# EAGLE board ProiectTSC v16 (EAGLE 9.7.0)
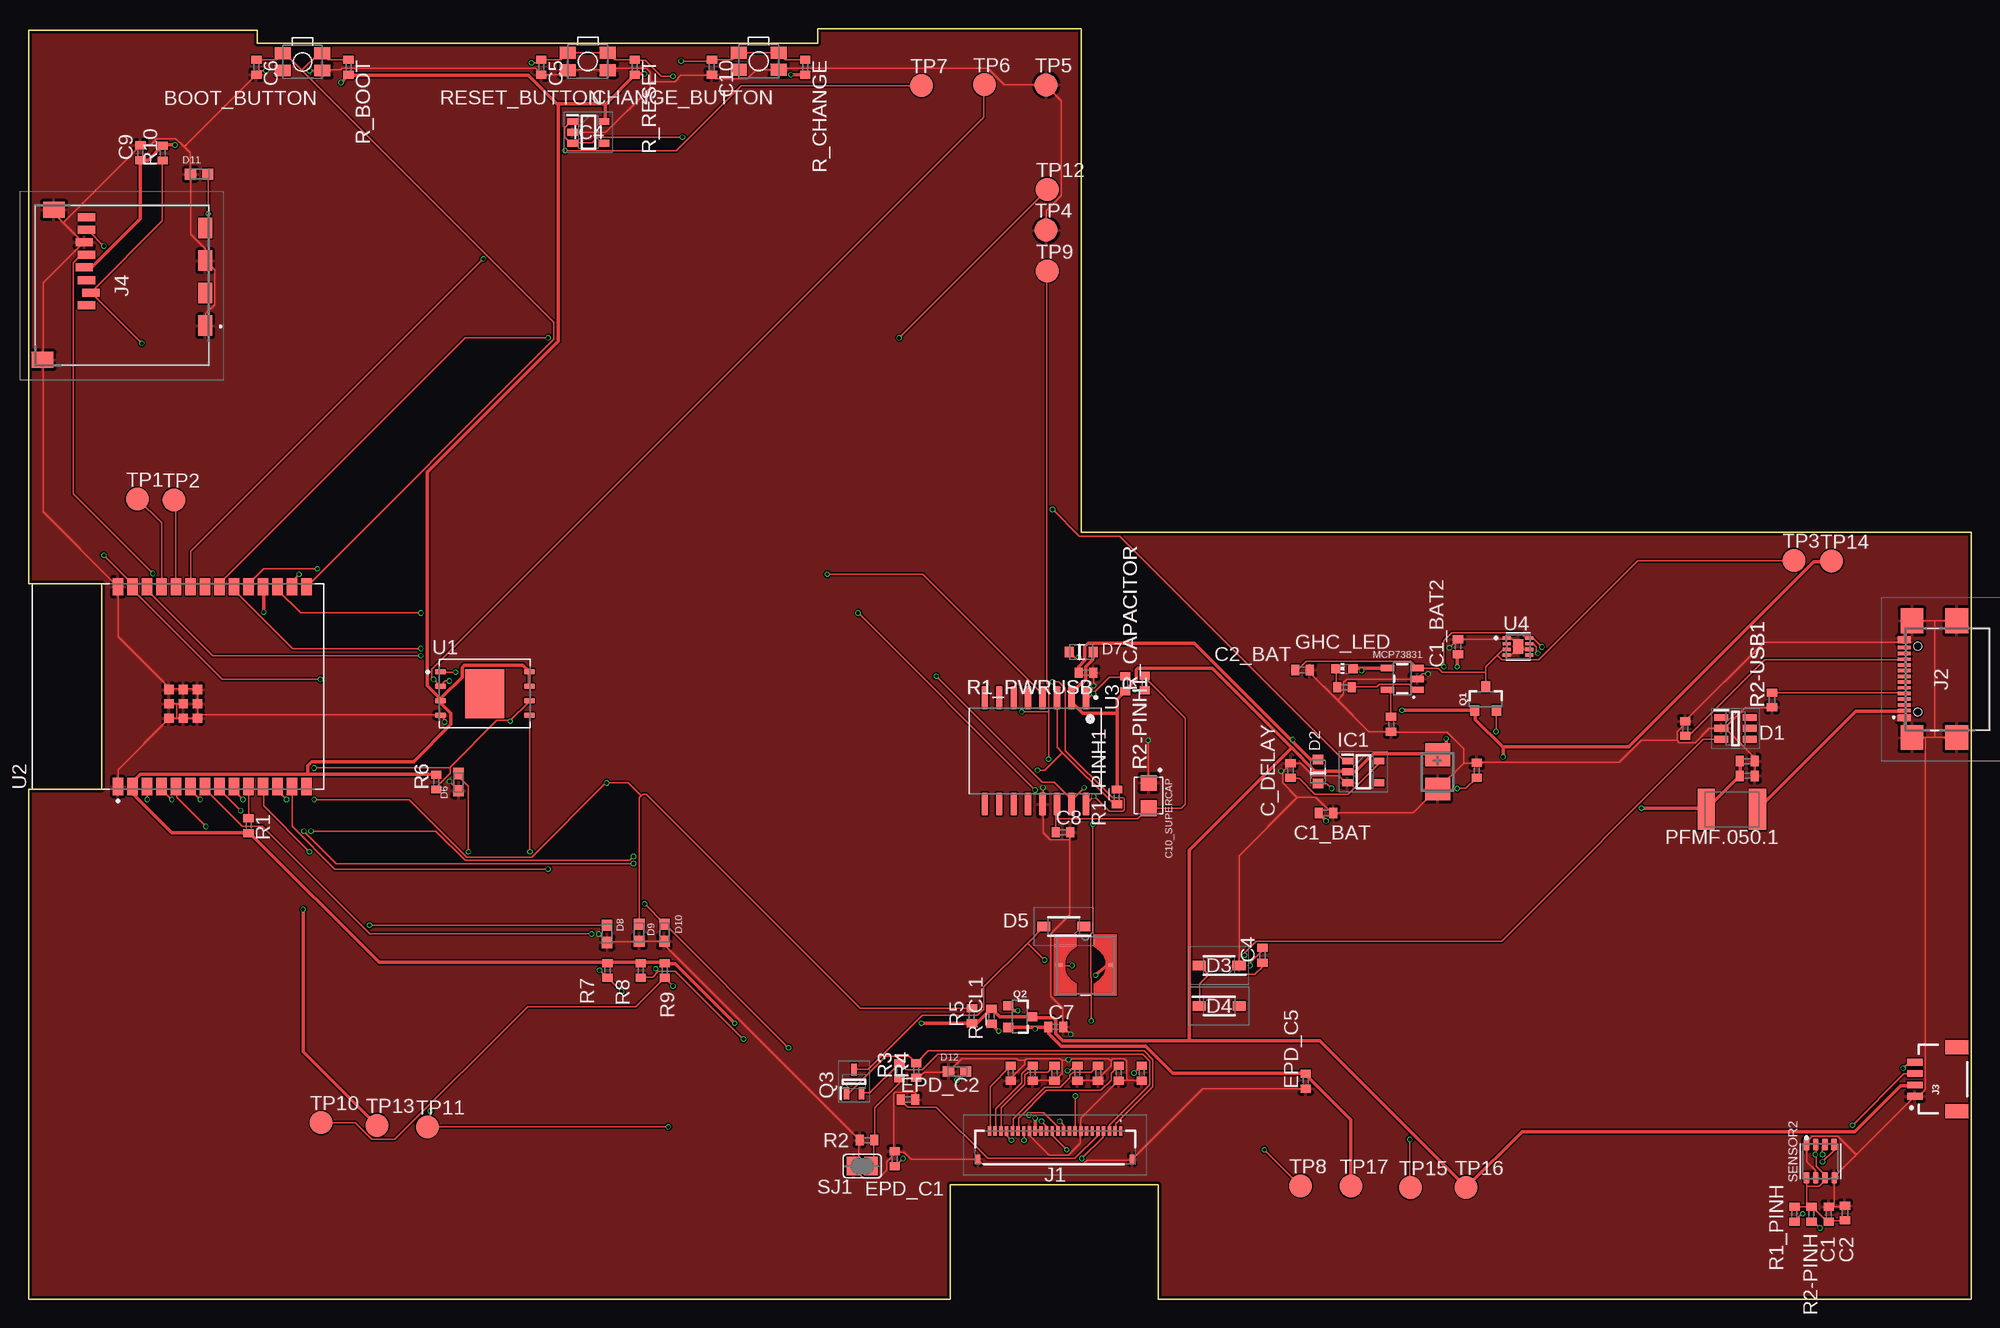
[diagram p0: board, top side]
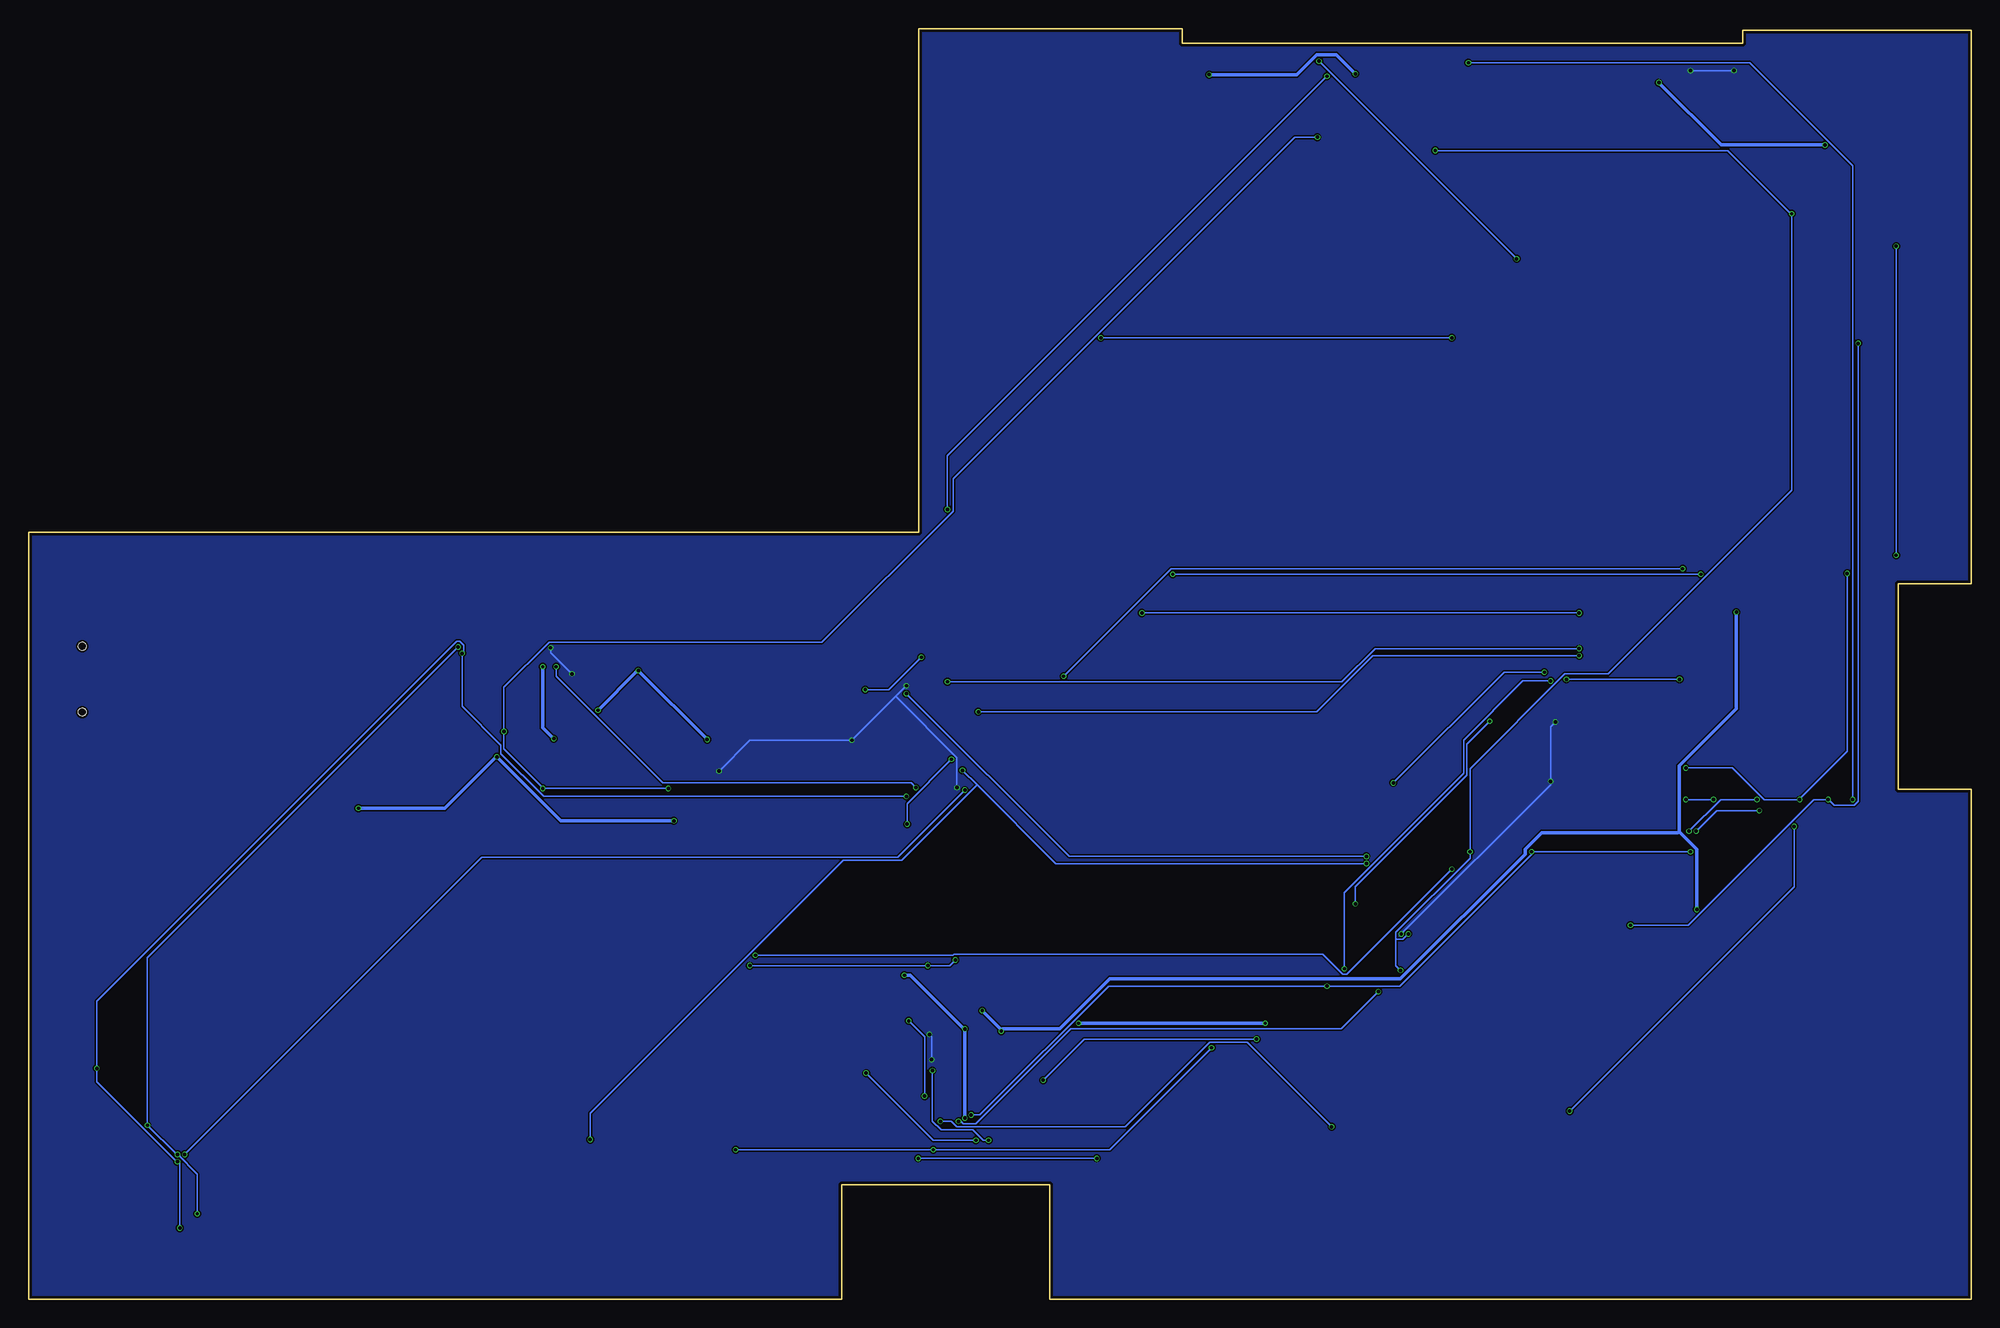
[diagram p1: board, bottom side, seen from below]

Size 170.2 x 111.3 mm. Coordinates in mm from the lower left corner, seen from the top.
Outline: 170.2,67.2 92.2,67.2 92.2,111.3 69.15,111.3 69.15,110 20.05,110 20.05,111.14 0,111.14 0,62.65 6.42,62.65 6.42,44.65 0,44.65 0,0 80.75,0 80.75,10 98.95,10 98.95,0 170.2,0 170.2,67.2
Copper layers (1*16): Top 0.035mm / dielectric 1.6mm / Bottom 0.035mm
Design rules "jlcpcb-2layers.dru": minimum track width 0.15mm, minimum drill 0.3mm, track to track 5mil, track to pad 5mil, pad to pad 5mil, via to via 5mil, smd to smd 5mil, copper to edge 0.2mm, drill to drill 6mil, minimum pad ring 10mil, minimum via ring 3mil, stop-mask expansion 4mil, vias tented up to drill 0mil, thermal gap 10mil
Net classes: 1 Vwires: width 0.3 mm

## Footprints (pad centres in the part's own frame; a part is rotated, then mirrored left to right if it is on the bottom)
MYBUTTON = smd 1.4 x 1.05: 1 1.75,0.75; 2 -1.75,0.75; 3 -1.75,-0.75; 4 1.75,-0.75
ESP32_WROVER_EAGLE-LTSPICE_C0402 = smd 0.7 x 0.9: 1 -0.65,0; 2 0.65,0
RCL_CT3528 = smd 2 x 2.2: + -1.5,0; - 1.5,0
CAPCP3225X100N = smd 1.4 x 1.4: 1 -1.1,0; 2 1.1,0
SOT95P280X145-6N = smd 1.2 x 0.6: 1 -1.25,0.95; 2 -1.25,0; 3 -1.25,-0.95; 4 1.25,-0.95; 5 1.25,0; 6 1.25,0.95
ESP32_WROVER_AVX---SD0805S020S1R0_AVX_SD0805S020S1R0_0 = smd 0.8 x 0.9: 1 -1.05,0; 2 1.05,0
SOD3716X135N = smd 1.15 x 0.8: 1 -1.75,0; 2 1.75,0
DIOC1608X36N = smd 0.97 x 0.94: 1 -0.75,0; 2 0.75,0
ADAFRUIT_CHIP-LED0603 = smd 0.8 x 0.8: A 0,-0.75; C 0,0.75
SOT95P280X125-5N = smd 0.9 x 0.6: 1 -1.4,0.95; 2 -1.4,0; 3 -1.4,-0.95; 4 1.4,-0.95; 5 1.4,0.95
SOT95P280X120-5N = smd 0.9 x 0.6: 1 -1.4,0.95; 2 -1.4,0; 3 -1.4,-0.95; 4 1.4,-0.95; 5 1.4,0.95
FH34SRJ24S05SH99 = smd 0.3 x 0.8: 1 5.75,1.45; 2 5.25,1.45; 3 4.75,1.45; 4 4.25,1.45; 5 3.75,1.45; 6 3.25,1.45; 7 2.75,1.45; 8 2.25,1.45; 9 1.75,1.45; 10 1.25,1.45; 11 0.75,1.45; 12 0.25,1.45; 13 -0.25,1.45; 14 -0.75,1.45; 15 -1.25,1.45; 16 -1.75,1.45; 17 -2.25,1.45; 18 -2.75,1.45; 19 -3.25,1.45; 20 -3.75,1.45; 21 -4.25,1.45; 22 -4.75,1.45; 23 -5.25,1.45; 24 -5.75,1.45 | smd 0.4 x 0.8: MP1 6.75,-1.05; MP2 -6.75,-1.05
SAMACSYS_PARTS_USB4110GFA = smd 0.3 x 1.15: A1 -3.53,3.788; A4 -2.73,3.778; A5 -1.25,3.778; A6 -0.25,3.778; A7 0.25,3.778; A8 1.25,3.778; A9 2.79,3.778; A12 3.6,3.778; B1 3.3,3.778; B4 2.25,3.778; B5 1.75,3.778; B6 0.75,3.778; B7 -0.75,3.778; B8 -1.75,3.778; B9 -2.25,3.778; B12 -3.23,3.788 | smd 2.18 x 2: MP1 -5.11,-0.827; MP2 5.11,-0.827; MP3 -5.11,3.103; MP4 5.11,3.103 | hole 0.65: -2.89,2.603; 2.89,2.603
JST04_1MM_RA = smd 0.6 x 1.35: 1 -1.5,0; 2 -0.5,0; 3 0.5,0; 4 1.5,0 | smd 1.2 x 2: NC1 2.8,-3.675; NC2 -2.8,-3.675
112ATAARR03ATTEND = smd 1.8 x 1.2: G1 10.6,10.4; G2 4.9,10.4; S1 7.75,10.4; S2 2.05,10.4 | smd 1.4 x 1.9: G3 13.6,-3.85; G4 0.45,-2.85 | smd 0.7 x 1.5: P1 8.8,0; P2 7.7,0.4; P3 6.6,0; P4 5.5,-0.2; P5 4.4,0; P6 3.3,-0.2; P7 2.2,0; P8 1.1,0
IND_4828-WE-TPC_WRE = smd 0.61 x 0.305: 1 -2.286,0; 2 2.286,0
ESP32_WROVER_SPARKFUN-IC-POWER_SOT23-5 = smd 0.55 x 1.2: 1 -0.95,-1.3; 2 0,-1.3; 3 0.95,-1.3; 4 0.95,1.3; 5 -0.95,1.3
ESP32C6_VARISTOR_CT/CN1812 = smd 1.5 x 3.6: 1 -2.25,0; 2 2.25,0
ESP32_WROVER_SPARKFUN-DISCRETESEMI_SOT23-3 = smd 0.8 x 0.9: 1 -0.95,-1; 2 0.95,-1; 3 0,1.1
SOT65P210X110-3N = smd 1.05 x 0.5: 1 -1.05,0.65; 2 -1.05,-0.65; 3 1.05,0
ESP32_WROVER_EAGLE-LTSPICE_R0402 = smd 0.7 x 0.9: 1 -0.65,0; 2 0.65,0
ESP32_WROVER_BME680_PSON80P300X300X100-8N = smd 1.016 x 0.5: 1 1.458,1.2; 2 1.458,0.4; 3 1.458,-0.4; 4 1.458,-1.2; 5 -1.458,-1.22; 6 -1.458,-0.4; 7 -1.458,0.4; 8 -1.458,1.2
SJ = smd 1.168 x 1.6: 1 -0.762,0; 2 0.762,0
TP20R = smd 2 x 2: TP 0,0
SON127P600X800X80-9N = smd 0.94 x 0.44: 1 -3.895,1.905; 2 -3.895,0.635; 3 -3.895,-0.635; 4 -3.895,-1.905; 5 3.895,-1.905; 6 3.895,-0.635; 7 3.895,0.635; 8 3.895,1.905 | smd 3.4 x 4.3: 9 0,0
XCVR_ESP32-C6-WROOM-1-N8 = smd 1.5 x 0.9: 1 -8.75,5.26; 2 -8.75,3.99; 3 -8.75,2.72; 4 -8.75,1.45; 5 -8.75,0.18; 6 -8.75,-1.09; 7 -8.75,-2.36; 8 -8.75,-3.63; 9 -8.75,-4.9; 10 -8.75,-6.17; 11 -8.75,-7.44; 12 -8.75,-8.71; 13 -8.75,-9.98; 14 -8.75,-11.25; 15 8.75,-11.25; 16 8.75,-9.98; 17 8.75,-8.71; 18 8.75,-7.44; 19 8.75,-6.17; 20 8.75,-4.9; 21 8.75,-3.63; 22 8.75,-2.36; 23 8.75,-1.09; 24 8.75,0.18; 25 8.75,1.45; 26 8.75,2.72; 27 8.75,3.99; 28 8.75,5.26 | smd 0.8 x 0.8: 29_1 -2.755,0.79; 29_2 -1.505,0.79; 29_3 -0.255,0.79; 29_4 -2.755,-0.46; 29_5 -1.505,-0.46; 29_6 -0.255,-0.46; 29_7 -2.755,-1.71; 29_8 -1.505,-1.71; 29_9 -0.255,-1.71
SOIC127P1032X265-16N = smd 2.05 x 0.59: 1 -4.655,4.445; 2 -4.655,3.175; 3 -4.655,1.905; 4 -4.655,0.635; 5 -4.655,-0.635; 6 -4.655,-1.905; 7 -4.655,-3.175; 8 -4.655,-4.445; 9 4.655,-4.445; 10 4.655,-3.175; 11 4.655,-1.905; 12 4.655,-0.635; 13 4.655,0.635; 14 4.655,1.905; 15 4.655,3.175; 16 4.655,4.445
SON50P200X200X80-9N = smd 0.76 x 0.27: 1 -0.985,0.75; 2 -0.985,0.25; 3 -0.985,-0.25; 4 -0.985,-0.75; 5 0.985,-0.75; 6 0.985,-0.25; 7 0.985,0.25; 8 0.985,0.75 | smd 0.9 x 1.3: 9 0,0

## Placement (x,y rotation side)
BOOT_BUTTON  BUTTON_CUSYOMV1  [MYBUTTON]  24,108.37 180 top
C1  100nf  [ESP32_WROVER_EAGLE-LTSPICE_C0402]  157.7,7.44 90 top
C1_BAT  4.7uF  [ESP32_WROVER_EAGLE-LTSPICE_C0402]  113.66,42.58 0 top
C1_BAT1  4.7uF  [ESP32_WROVER_EAGLE-LTSPICE_C0402]  126.86,46.32 90 top
C1_BAT2  4.7uF  [ESP32_WROVER_EAGLE-LTSPICE_C0402]  125.22,57.15 90 top
C2  100nf  [ESP32_WROVER_EAGLE-LTSPICE_C0402]  159.12,7.54 90 top
C2_BAT  4.7uF  [ESP32_WROVER_EAGLE-LTSPICE_C0402]  111.6,55.11 0 top
C3  100uF TANT  [RCL_CT3528]  123.43,46.18 270 top
C4  4.7uF/25V  [ESP32_WROVER_EAGLE-LTSPICE_C0402]  108.09,30.12 90 top
C4_USB  100nF  [ESP32_WROVER_EAGLE-LTSPICE_C0402]  150.57,45.83 0 top
C5  1uF  [ESP32_WROVER_EAGLE-LTSPICE_C0402]  44.92,107.91 270 top
C5_USB  4.7uF  [ESP32_WROVER_EAGLE-LTSPICE_C0402]  150.56,47.13 0 top
C6  100nF  [ESP32_WROVER_EAGLE-LTSPICE_C0402]  19.96,107.91 270 top
C7  10uF  [ESP32_WROVER_EAGLE-LTSPICE_C0402]  89.97,23.84 0 top
C8  100nF  [ESP32_WROVER_EAGLE-LTSPICE_C0402]  90.62,40.89 0 top
C9  100nF  [ESP32_WROVER_EAGLE-LTSPICE_C0402]  9.8,100.42 90 top
C10  100nF  [ESP32_WROVER_EAGLE-LTSPICE_C0402]  59.86,107.91 270 top
C10_SUPERCAP  CPH3225A  [CAPCP3225X100N]  98.11,44.11 270 top
C_DELAY  100nF  [ESP32_WROVER_EAGLE-LTSPICE_C0402]  110.55,46.3 90 top
CHANGE_BUTTON  BUTTON_CUSYOMV1  [MYBUTTON]  63.96,108.43 180 top
D1  USBLC6-2SC6Y  [SOT95P280X145-6N]  149.53,50 0 top
D2  ESP32_WROVER_AVX---SD0805S020S1R0_AVX_SD0805S020S1R0_0_0AVX_SD0805S020S1R0_0_0  [ESP32_WROVER_AVX---SD0805S020S1R0_AVX_SD0805S020S1R0_0]  112.95,46.22 90 top
D3  MBR0530  [SOD3716X135N]  104.29,29.22 180 top
D4  MBR0530  [SOD3716X135N]  104.31,25.67 0 top
D5  MBR0530  [SOD3716X135N]  90.69,32.64 180 top
D6  PGB1010603MR  [DIOC1608X36N]  37.67,45.29 90 top
D7  ESP32_WROVER_AVX---SD0805S020S1R0_AVX_SD0805S020S1R0_0_0AVX_SD0805S020S1R0_0_0  [ESP32_WROVER_AVX---SD0805S020S1R0_AVX_SD0805S020S1R0_0]  92.22,56.68 0 top
D8  PGB1010603MR  [DIOC1608X36N]  50.68,31.99 90 top
D9  PGB1010603MR  [DIOC1608X36N]  53.49,32.09 90 top
D10  PGB1010603MR  [DIOC1608X36N]  55.7,32.09 90 top
D11  PGB1010603MR  [DIOC1608X36N]  14.94,98.54 0 top
D12  PGB1010603MR  [DIOC1608X36N]  81.34,19.93 0 top
EPC_C6  1uF/50V  [ESP32_WROVER_EAGLE-LTSPICE_C0402]  97.51,19.79 90 top
EPC_C8  1uF/50V  [ESP32_WROVER_EAGLE-LTSPICE_C0402]  93.69,19.79 90 top
EPD_C1  1uF/50V  [ESP32_WROVER_EAGLE-LTSPICE_C0402]  75.88,12.29 90 top
EPD_C2  1uF/50V  [ESP32_WROVER_EAGLE-LTSPICE_C0402]  77.04,17.48 0 top
EPD_C5  0.1uF/50V  [ESP32_WROVER_EAGLE-LTSPICE_C0402]  111.89,19.09 90 top
EPD_C7  1uF/50V  [ESP32_WROVER_EAGLE-LTSPICE_C0402]  95.5,19.79 90 top
EPD_C9  1uF/50V  [ESP32_WROVER_EAGLE-LTSPICE_C0402]  91.88,19.79 90 top
EPD_C10  1uF/50V  [ESP32_WROVER_EAGLE-LTSPICE_C0402]  89.87,19.79 90 top
EPD_C11  1uF/50V  [ESP32_WROVER_EAGLE-LTSPICE_C0402]  87.96,19.79 90 top
EPD_C12  1uF/50V  [ESP32_WROVER_EAGLE-LTSPICE_C0402]  86.05,19.79 90 top
GHC_LED  [ADAFRUIT_CHIP-LED0603]  115.27,55.23 90 top
IC1  BD5229G-TR  [SOT95P280X125-5N]  116.93,46.18 0 top
IC4  XC6220A331MR-G  [SOT95P280X120-5N]  49.04,102.2 0 top
J1  FH34SRJ-24S-0.5SH_99_  [FH34SRJ24S05SH99]  89.93,13.28 0 top
J2  SAMACSYS_PARTS_USB4110-GF-A  [SAMACSYS_PARTS_USB4110GFA]  168.1,54.3 90 top
J3  QWIIC_RIGHT_ANGLE  [JST04_1MM_RA]  165.25,19.26 90 top
J4  112A-TAAR-R03_ATTEND  [112ATAARR03ATTEND]  5.08,95.87 270 top
L1  744043680IND_4828-WE-TPC_WRE  [IND_4828-WE-TPC_WRE]  92.58,29.25 0 top
MCP73831  ESP32_WROVER_SPARKFUN-IC-POWER_MCP73831  [ESP32_WROVER_SPARKFUN-IC-POWER_SOT23-5]  120.34,54.33 90 top
PFMF.050.1  ESP32C6_VARISTORCN1812  [ESP32C6_VARISTOR_CT/CN1812]  149.21,42.9 180 top
Q1  20V/4.2A/52mΩ/1.4W  [ESP32_WROVER_SPARKFUN-DISCRETESEMI_SOT23-3]  127.64,52.56 0 top
Q2  20V/4.2A/52mΩ/1.4W  [ESP32_WROVER_SPARKFUN-DISCRETESEMI_SOT23-3]  86.83,24.74 270 top
Q3  SI1308EDL-T1-GE3  [SOT65P210X110-3N]  72.31,19.06 90 top
R1  10K  [ESP32_WROVER_EAGLE-LTSPICE_R0402]  19.28,41.47 270 top
R1_BAT  200  [ESP32_WROVER_EAGLE-LTSPICE_R0402]  115.28,53.6 0 top
R1_PINH  10K  [ESP32_WROVER_EAGLE-LTSPICE_R0402]  154.69,7.44 90 top
R1_PINH1  10K  [ESP32_WROVER_EAGLE-LTSPICE_R0402]  95.34,43.99 90 top
R1_PWRUSB  [ESP32_WROVER_EAGLE-LTSPICE_R0402]  92.63,54.86 180 top
R2  2.2  [ESP32_WROVER_EAGLE-LTSPICE_R0402]  73.45,13.93 0 top
R2-PINH  10K  [ESP32_WROVER_EAGLE-LTSPICE_R0402]  156.18,7.44 90 top
R2-PINH1  10K  [ESP32_WROVER_EAGLE-LTSPICE_R0402]  96.08,53.91 270 top
R2-USB  5k1  [ESP32_WROVER_EAGLE-LTSPICE_R0402]  145.13,49.99 90 top
R2-USB1  5k1  [ESP32_WROVER_EAGLE-LTSPICE_R0402]  152.73,52.48 90 top
R2_BAT  2K  [ESP32_WROVER_EAGLE-LTSPICE_R0402]  119.36,50.35 90 top
R3  0.47  [ESP32_WROVER_EAGLE-LTSPICE_R0402]  76.29,20.01 90 top
R4  10K  [ESP32_WROVER_EAGLE-LTSPICE_R0402]  77.77,20.02 90 top
R5  10K  [ESP32_WROVER_EAGLE-LTSPICE_R0402]  82.64,24.81 270 top
R6  10K  [ESP32_WROVER_EAGLE-LTSPICE_R0402]  35.71,45.29 90 top
R7  10K  [ESP32_WROVER_EAGLE-LTSPICE_R0402]  50.72,28.79 90 top
R8  10K  [ESP32_WROVER_EAGLE-LTSPICE_R0402]  53.63,28.79 90 top
R9  10K  [ESP32_WROVER_EAGLE-LTSPICE_R0402]  55.74,28.79 90 top
R10  10K  [ESP32_WROVER_EAGLE-LTSPICE_R0402]  11.75,100.39 90 top
R_BOOT  10K  [ESP32_WROVER_EAGLE-LTSPICE_R0402]  28.04,107.91 270 top
R_CAPACITOR  15  [ESP32_WROVER_EAGLE-LTSPICE_R0402]  97.78,53.97 90 top
R_CHANGE  10K  [ESP32_WROVER_EAGLE-LTSPICE_R0402]  68.04,107.91 270 top
R_CL1  10K  [ESP32_WROVER_EAGLE-LTSPICE_R0402]  84.36,24.79 90 top
R_RESET  10K  [ESP32_WROVER_EAGLE-LTSPICE_R0402]  53.1,107.91 270 top
RESET_BUTTON  BUTTON_CUSYOMV1  [MYBUTTON]  49,108.42 180 top
SENSOR2  ESP32_WROVER_BME680_BME680  [ESP32_WROVER_BME680_PSON80P300X300X100-8N]  156.96,12.09 90 top
SJ1  [SJ]  73.03,11.65 0 top
TP1  TPTP20R  [TP20R]  9.54,70.08 0 top
TP2  TPTP20R  [TP20R]  12.74,70 0 top
TP3  TPTP20R  [TP20R]  154.64,64.72 0 top
TP4  TPTP20R  [TP20R]  89.14,93.64 0 top
TP5  TPTP20R  [TP20R]  89.14,106.36 0 top
TP6  TPTP20R  [TP20R]  83.74,106.38 0 top
TP7  TPTP20R  [TP20R]  78.24,106.3 0 top
TP8  TPTP20R  [TP20R]  111.44,9.92 0 top
TP9  TPTP20R  [TP20R]  89.24,90.04 0 top
TP10  TPTP20R  [TP20R]  25.64,15.46 0 top
TP11  TPTP20R  [TP20R]  34.94,15.08 0 top
TP12  TPTP20R  [TP20R]  89.24,97.2 0 top
TP13  TPTP20R  [TP20R]  30.54,15.22 0 top
TP14  TPTP20R  [TP20R]  157.94,64.64 0 top
TP15  TPTP20R  [TP20R]  121.04,9.76 0 top
TP16  TPTP20R  [TP20R]  125.94,9.78 0 top
TP17  TPTP20R  [TP20R]  115.84,9.9 0 top
U1  W25Q512JVEIQ  [SON127P600X800X80-9N]  39.97,53.04 0 top
U2  ESP32-C6-WROOM-1-N8  [XCVR_ESP32-C6-WROOM-1-N8]  13.09,53.65 90 top
U3  DS3231SN#  [SOIC127P1032X265-16N]  88.19,48.02 270 top
U4  MAX17048G+T10  [SON50P200X200X80-9N]  130.49,57.16 0 top

## Library data of the parts
BOOT_BUTTON CHANGE_BUTTON GHC_LED PFMF.050.1 RESET_BUTTON SJ1 TP1-TP17 = DeskAssistant v19 v1
C1 C1_BAT C1_BAT1 C1_BAT2 C2 C2_BAT C4 C4_USB C5 C5_USB C6-C10 C_DELAY EPC_C6 EPC_C8 EPD_C1 EPD_C2 EPD_C5 EPD_C7 EPD_C9-EPD_C12 = DeskAssistant v19 v1; SPICEMODEL: NONE; SPICEPREFIX: C
C3 = DeskAssistant v19 v1; SPICEPREFIX: C
C10_SUPERCAP = DeskAssistant v19 v1; AVAILABILITY: Not in stock; CHECK_PRICES: https://www.snapeda.com/parts/CPH3225A/Seiko+Instruments/view-part/?ref=eda; DESCRIPTION: 11 mF (EDLC) Supercapacitor 3.3 V 1210 (3225 Metric) - -; MF: Seiko Instruments; MP: CPH3225A; PACKAGE: 1210 Seiko; PRICE: None; PURCHASE-URL: https://www.snapeda.com/api/url_track_click_mouser/?unipart_id=562593&manufacturer=Seiko Instruments&part_name=CPH3225A&search_term=None; SNAPEDA_LINK: https://www.snapeda.com/parts/CPH3225A/Seiko+Instruments/view-part/?ref=snap
D1 = DeskAssistant v19 v1; AVAILABILITY: In Stock; CHECK_PRICES: https://www.snapeda.com/parts/USBLC6-2SC6Y/STMicroelectronics/view-part/?ref=eda; DESCRIPTION: 17V Clamp 5A (8/20µs) Ipp Tvs Diode Surface Mount SOT-23-6; MF: STMicroelectronics; MP: USBLC6-2SC6Y; PACKAGE: SOT-23-6 STMicroelectronics; PRICE: None; SNAPEDA_LINK: https://www.snapeda.com/parts/USBLC6-2SC6Y/STMicroelectronics/view-part/?ref=snap
D2 D7 = DeskAssistant v19 v1; CENTROID_NOT_SPECIFIED: No; DATASHEET: http://datasheets.avx.com/schottky.pdf; DIGIKEY_DESCRIPTION: DIODE SCHOTTKY 20V 1A 0805; DIGIKEY_PART_NUMBER: 478-7800-1-ND; LEAD_FREE: yes; MF: AVX; MOUSER_PART_NUMBER: 581-SD0805S020S1R0; PACKAGE: 0805 (2012 metric); PREFIX: D; ROHS: yes; TEMPERATURE_RANGE_HIGH: +125°C; TEMPERATURE_RANGE_LOW: -55°C
D3-D5 = DeskAssistant v19 v1; AVAILABILITY: In Stock; CHECK_PRICES: https://www.snapeda.com/parts/MBR0530/Onsemi/view-part/?ref=eda; DESCRIPTION: Diode Schottky 30 V 500mA Surface Mount SOD-123; MF: ON Semiconductor; MP: MBR0530; PACKAGE: SOD-123-2 ON Semiconductor; PRICE: None; PURCHASE-URL: https://www.snapeda.com/api/url_track_click_mouser/?unipart_id=179458&manufacturer=ON Semiconductor&part_name=MBR0530&search_term=None; SNAPEDA_LINK: https://www.snapeda.com/parts/MBR0530/Onsemi/view-part/?ref=snap
D6 D8-D12 = DeskAssistant v19 v1; AVAILABILITY: In Stock; CHECK_PRICES: https://www.snapeda.com/parts/PGB1010603MR/Littelfuse/view-part/?ref=eda; DESCRIPTION: 150V (Typ) Clamp - Ipp Tvs Diode Surface Mount 0603 (1608 Metric); MF: Littelfuse Inc.; MP: PGB1010603MR; PACKAGE: 0603 Littelfuse Inc.; PRICE: None; PURCHASE-URL: https://www.snapeda.com/api/url_track_click_mouser/?unipart_id=5659453&manufacturer=Littelfuse Inc.&part_name=PGB1010603MR&search_term=None; SNAPEDA_LINK: https://www.snapeda.com/parts/PGB1010603MR/Littelfuse/view-part/?ref=snap
IC1 = DeskAssistant v19 v1; DESCRIPTION: Voltage Detector with Adjustable Delay Time: CMOS processes are utilized to develop high precision, low current consumption CMOS reset ICs that allow arbitrary setting of the delay time. The extensive lineup includes both Nch Open Drain and CMOS output types in a wide range of detection voltages (from 2.3V to 6.0V, in 0.1V steps), enabling selection of the ideal solution based on customer requirements. In addition, the entire series is of course both lead-free and RoHS-compliant.; HEIGHT: 1.25mm; MANUFACTURER_NAME: ROHM Semiconductor; MANUFACTURER_PART_NUMBER: BD5229G-TR; MOUSER_PART_NUMBER: 755-BD5229G-TR; MOUSER_PRICE-STOCK: https://www.mouser.co.uk/ProductDetail/ROHM-Semiconductor/BD5229G-TR?qs=4kLU8WoGk0vvnhrrYwdszw%3D%3D
IC4 = DeskAssistant v19 v1; DESCRIPTION: LDO Voltage Regulators; HEIGHT: 1.2mm; MANUFACTURER_NAME: Torex; MANUFACTURER_PART_NUMBER: XC6220A331MR-G; MOUSER_PART_NUMBER: 865-XC6220A331MR-G; MOUSER_PRICE-STOCK: https://www.mouser.co.uk/ProductDetail/Torex-Semiconductor/XC6220A331MR-G?qs=AsjdqWjXhJ8ZSWznL1J0gg%3D%3D
J1 = DeskAssistant v19 v1; DESCRIPTION: 24 Position FFC, FPC Connector Contacts, Top and Bottom 0.020" (0.50mm) Surface Mount, Right Angle; HEIGHT: 1.1mm; MANUFACTURER_NAME: Hirose; MANUFACTURER_PART_NUMBER: FH34SRJ-24S-0.5SH(99); MOUSER_PART_NUMBER: 798-FH34SRJ24S05SH99; MOUSER_PRICE-STOCK: https://www.mouser.co.uk/ProductDetail/Hirose-Connector/FH34SRJ-24S-0.5SH99?qs=vcbW%252B4%252BSTIpKBl5ap9J8Fw%3D%3D
J2 = DeskAssistant v19 v1; DESCRIPTION: CONN USB 2.0 TYPE-C R/A SMT; HEIGHT: 3.26mm; MANUFACTURER_NAME: GCT (GLOBAL CONNECTOR TECHNOLOGY); MANUFACTURER_PART_NUMBER: USB4110-GF-A; MOUSER_PART_NUMBER: 640-USB4110-GF-A; MOUSER_PRICE-STOCK: https://www.mouser.co.uk/ProductDetail/GCT/USB4110-GF-A?qs=KUoIvG%2F9IlYiZvIXQjyJeA%3D%3D
J3 = DeskAssistant v19 v1; PROD_ID: CONN-13694
J4 = DeskAssistant v19 v1; DESCRIPTION: Micro SD Card Socket, Push-Push Type, Top Mount, SMT, H=1.83mm, 10u; HEIGHT: 1.9mm; MANUFACTURER_NAME: ATTEND; MANUFACTURER_PART_NUMBER: 112A-TAAR-R03 ATTEND
L1 = DeskAssistant v19 v1; COPYRIGHT: Copyright (C) 2024 Ultra Librarian. All rights reserved.; MANUFACTURER_PART_NUMBER: 744043680; MFR_NAME: Wurth Electronics
MCP73831 = DeskAssistant v19 v1; PROD_ID: IC-09995
Q1 Q2 = DeskAssistant v19 v1; PROD_ID: TRAN-14388
Q3 = DeskAssistant v19 v1; AVAILABILITY: In Stock; CHECK_PRICES: https://www.snapeda.com/parts/SI1308EDL-T1-GE3/Vishay+Siliconix/view-part/?ref=eda; DESCRIPTION: Si1308EDL-T1-GE3 N-channel MOSFET Transistor, 1.5 A, 30 V, 3-Pin SC-70 | Siliconix / Vishay SI1308EDL-T1-GE3; MF: Vishay Siliconix; MP: SI1308EDL-T1-GE3; PACKAGE: SOT-323 Vishay Semiconductor; PRICE: None; PURCHASE-URL: https://www.snapeda.com/api/url_track_click_mouser/?unipart_id=274603&manufacturer=Vishay Siliconix&part_name=SI1308EDL-T1-GE3&search_term=None; SNAPEDA_LINK: https://www.snapeda.com/parts/SI1308EDL-T1-GE3/Vishay+Siliconix/view-part/?ref=snap
R1 R1_BAT R1_PINH R1_PINH1 R2 R2-PINH R2-PINH1 R2-USB R2-USB1 R2_BAT R3-R10 R_BOOT R_CAPACITOR R_CHANGE R_CL1 R_RESET = DeskAssistant v19 v1; SPICEMODEL: NONE; SPICEPREFIX: R
R1_PWRUSB = DeskAssistant v19 v1; SPICEMODEL: 100K; SPICEPREFIX: R
SENSOR2 = DeskAssistant v19 v1; AVAILABILITY: Unavailable; DESCRIPTION: Integrated Environmental Unit; MF: Bosch Sensortec; MP: BME680; PACKAGE: LGA-8 Bosch Tools; PRICE: None
U1 = DeskAssistant v19 v1; AVAILABILITY: In Stock; CHECK_PRICES: https://www.snapeda.com/parts/W25Q512JVEIQ/Winbond+Electronics/view-part/?ref=eda; DESCRIPTION: FLASH - NOR Memory IC 512Mb (64M x 8) SPI - Quad I/O 133 MHz 8-WSON (8x6); MF: Winbond Electronics; MP: W25Q512JVEIQ; PACKAGE: Package; PRICE: None; SNAPEDA_LINK: https://www.snapeda.com/parts/W25Q512JVEIQ/Winbond+Electronics/view-part/?ref=snap
U2 = DeskAssistant v19 v1; AVAILABILITY: In Stock; CHECK_PRICES: https://www.snapeda.com/parts/ESP32-C6-WROOM-1-N8/Espressif+Systems/view-part/?ref=eda; DESCRIPTION: Multiprotocol Modules ESP32-C6 module, Wi-Fi 6 in 2.4 GHz band, Bluetooth 5, Zigbee 3.0 and Thread. ESP34-WROOM Compatible - ENGINEERING SAMPLE; MF: Espressif Systems; MP: ESP32-C6-WROOM-1-N8; PACKAGE: None; PRICE: None; SNAPEDA_LINK: https://www.snapeda.com/parts/ESP32-C6-WROOM-1-N8/Espressif+Systems/view-part/?ref=snap
U3 = DeskAssistant v19 v1; AVAILABILITY: In Stock; CHECK_PRICES: https://www.snapeda.com/parts/DS3231SN%23/Analog+Devices/view-part/?ref=eda; DESCRIPTION: Extremely Accurate I²C-Integrated RTC/TCXO/Crystal; MF: Analog Devices; MP: DS3231SN#; PACKAGE: SOIC-16 Maxim; PRICE: None; PURCHASE-URL: https://www.snapeda.com/api/url_track_click_mouser/?unipart_id=99048&manufacturer=Analog Devices&part_name=DS3231SN#&search_term=None; SNAPEDA_LINK: https://www.snapeda.com/parts/DS3231SN%23/Analog+Devices/view-part/?ref=snap
U4 = DeskAssistant v19 v1; AVAILABILITY: In Stock; CHECK_PRICES: https://www.snapeda.com/parts/MAX17048G+T10/Analog+Devices/view-part/?ref=eda; DESCRIPTION: 3µA 1-Cell/2-Cell Fuel Gauge with ModelGauge; MF: Analog Devices; MP: MAX17048G+T10; PACKAGE: TDFN-8 Maxim; PRICE: None; PURCHASE-URL: https://www.snapeda.com/api/url_track_click_mouser/?unipart_id=329239&manufacturer=Analog Devices&part_name=MAX17048G+T10&search_term=None; SNAPEDA_LINK: https://www.snapeda.com/parts/MAX17048G+T10/Analog+Devices/view-part/?ref=snap

## Nets
3V3 [Vwires]: C1_BAT2.1 C3.+ C9.1 D7.2 IC1.2 IC4.5 J3.2 J4.P4 Q2.3 R1.2 R1_PINH1.2 R2-PINH1.2 R5.2 R6.2 R7.2 R8.2 R9.2 R10.2 R_BOOT.2 R_CHANGE.2 R_CL1.2 R_RESET.2 TP16.TP U1.3 U1.7 U1.8 U2.2 U3.2
32KHZ: R2-PINH1.1 U2.9 U3.1
DP: J2.A6
EOD_RST: J1.10
EPD_3V3 [Vwires]: C7.1 EPD_C5.2 J1.15 J1.16 L1.2 Q2.2 TP17.TP
EPD_3V3_C [Vwires]: Q2.1 R_CL1.1 TP13.TP U2.18
EPD_BUSY: J1.9 TP9.TP U2.26
EPD_CS: D6.2 J1.12 R9.1 TP10.TP U2.11
EPD_DC: J1.11 TP11.TP U2.5
EPD_RST: TP12.TP U2.21
FLASH_CS: D9.2 R5.1 U1.1 U2.12
GDR: J1.2 Q3.1 R4.2
GND: BOOT_BUTTON.2 C1.2 C1_BAT1.2 C1_BAT2.2 C1_BAT.2 C2.2 C2_BAT.2 C3.- C4_USB.2 C5.2 C5_USB.2 C6.2 C7.2 C8.2 C9.2 C10.2 C10_SUPERCAP.1 C_DELAY.2 CHANGE_BUTTON.2 D1.2 D3.1 D6.1 D8.1 D9.1 D10.1 D11.1 D12.1 EPC_C6.1 EPC_C8.1 EPD_C1.2 EPD_C2.2 EPD_C5.1 EPD_C7.1 EPD_C9.1 EPD_C10.1 EPD_C11.1 EPD_C12.1 IC1.3 IC4.2 J1.8 J1.17 J1.MP1 J1.MP2 J2.A1 J2.A12 J2.B1 J2.B12 J2.MP1 J2.MP2 J2.MP3 J2.MP4 J3.1 J4.G1 J4.G2 J4.G3 J4.G4 J4.P6 MCP73831.2 R1_PWRUSB.1 R2-USB1.1 R2-USB.2 R2.1 R2_BAT.1 R4.1 RESET_BUTTON.1 RESET_BUTTON.2 SENSOR2.1 SENSOR2.5 SENSOR2.7 SJ1.1 TP4.TP TP5.TP U1.4 U2.1 U2.28 U2.29_1 U2.29_2 U2.29_3 U2.29_4 U2.29_5 U2.29_6 U2.29_7 U2.29_8 U2.29_9 U3.13 U4.1 U4.4 U4.6 U4.9
I2C_PW: C1.1 C2.1 R1_PINH.2 R2-PINH.2 SENSOR2.2 SENSOR2.6 SENSOR2.8 U2.17
INT_RTC: R1_PINH1.1 TP15.TP U2.8 U3.3
IO/BOOT: BOOT_BUTTON.3 BOOT_BUTTON.4 C6.1 R_BOOT.1 U2.15
IO/CHANGE: C10.1 CHANGE_BUTTON.3 CHANGE_BUTTON.4 R_CHANGE.1 U2.23
MISO: D12.2 J4.P7 R8.1 TP6.TP U1.2 U2.27
MOSI: D11.2 J1.14 R7.1 TP7.TP U1.5 U2.7
N$1: J2.A5 R2-USB1.2
N$2: J2.B4
N$3: J2.A7
N$4: J2.A9
N$5: J2.B5 R2-USB.1
N$6: J2.B6
N$7: J2.B7
N$8: J2.B9
N$9: D1.4
N$10: D1.5
N$11: D1.6
N$12: C1_BAT1.1 D2.1 IC4.1 IC4.3 Q1.2
N$13: D1.1
N$14: C4.1 D3.2 D4.1
N$15: J4.P3
N$16: GHC_LED.C R1_BAT.1
N$17: MCP73831.1 R1_BAT.2
N$18: EPD_C12.2 J1.24
N$19: MCP73831.5 R2_BAT.2
N$20: EPD_C11.2 J1.23
N$21: EPD_C10.2 J1.22
N$22: EPD_C9.2 J1.21
N$23: EPC_C8.2 J1.20
N$24: EPD_C7.2 J1.19
N$25: EPC_C6.2 J1.18
N$26: EPD_C2.1 J1.5
N$27: EPD_C1.1 J1.4
N$28: R1.1 U2.10
N$29: BOOT_BUTTON.1
N$30: CHANGE_BUTTON.1
N$31: D7.1 R_CAPACITOR.1
N$32: C_DELAY.1 IC1.5
PREVGH: D5.1
PREVGL: D4.2
RESE: J1.3 Q3.2 R3.2
RESE': R2.2 R3.1 SJ1.2
RESET: C5.1 IC1.1 R_RESET.1 RESET_BUTTON.3 RESET_BUTTON.4 U2.3
RTC_RST: U2.16 U3.4
RX: TP2.TP U2.24
SCK: D10.2 J1.13 J4.P5 R6.1 TP8.TP U1.6 U2.6
SCL: J3.4 R2-PINH.1 SENSOR2.4 U2.20 U3.16 U4.7
SDA: J3.3 R1_PINH.1 SENSOR2.3 U2.19 U3.15 U4.8
SRC: C4.2 D5.2 L1.1 Q3.3
SS_SD: D8.2 J4.P2 R10.1 U2.4
TX: TP1.TP U2.25
USB_D+: U2.14
USB_D-: D1.3 U2.13
VBAT: C2_BAT.1 MCP73831.3 Q1.3 TP3.TP U4.2 U4.3
VBUS [Vwires]: C1_BAT.1 C4_USB.1 C5_USB.1 D2.2 GHC_LED.A MCP73831.4 PFMF.050.1.2 Q1.1 R1_PWRUSB.2 TP14.TP
VRTC: C8.1 C10_SUPERCAP.2 R_CAPACITOR.2 U3.14
VUSB [Vwires]: J2.A4 PFMF.050.1.1

## Tracks (layer width: path | path; a pad name or v marks a point on that pad's centre or on a via)
3V3  (via drill 0.3)
  Top 0.3: D7.2 93.23,56.64 93.23,56.02 92.61,55.39 92.61,54.29 92.33,54.01 92.26,54.01 91.43,53.18 91.43,52.69 U3.2 91.5,52.55 91.5,52.14 92.33,51.31 95.38,51.31 | 95.38,51.31 95.38,52.55 96.07,53.25 R2-PINH1.2 96.14,53.39 97.04,54.29 97.04,55.12 97.18,55.26 103.69,55.26 110.65,48.3 | 95.38,51.31 95.38,44.66 R1_PINH1.2 | v125.16,55.39 125.16,56.43 C1_BAT2.1 | v124.19,49.09 124.19,48.68 123.43,47.92 C3.+ 123.43,47.71 123.36,47.78 117.82,47.78 116.22,46.18 IC1.2 115.39,46.25 112.69,46.25 110.65,48.3 | J3.2 165.18,18.69 164.01,18.69 159.99,14.67 130.84,14.67 125.99,9.83 TP16.TP 125.85,9.9 113.11,22.64 101.68,22.64 | 101.68,22.64 90.6,22.64 89.98,23.26 89.98,24.44 89.77,24.65 88.04,24.65 Q2.3 87.9,24.72 85.06,24.72 84.44,25.34 R_CL1.2 84.3,25.41 83.05,24.16 82.71,24.16 R5.2 82.5,24.16 v78.21,24.16 | 110.65,48.3 101.68,39.33 101.68,22.64 | 36.1,52.62 36.1,52.42 U1.3 36.17,52.28 36.17,52.14 37,51.31 37,50.34 33.75,47.08 24.81,47.08 24.47,46.74 24.47,45.98 | 36.1,52.62 37.97,54.49 37.97,55.32 38.18,55.53 43.3,55.53 43.86,54.98 U1.8 43.86,54.84 43.86,53.73 U1.7 | 24.47,45.98 9.79,45.98 9.23,45.42 9.23,45.01 U2.2 9.16,44.87 9.16,44.24 12.56,40.85 19.27,40.85 R1.2 19.41,40.78 30.7,29.49 50.58,29.49 R7.2 50.78,29.49 53.62,29.49 R8.2 53.76,29.49 55.7,29.49 R9.2 55.84,29.36 56.67,29.36 v61.86,24.16 | 24.47,45.98 35.69,45.98 R6.2 | J4.P4 4.94,90.43 5.56,90.43 9.79,94.66 9.79,99.64 C9.1 9.86,99.78 10.48,99.78 11.73,101.03 R10.2 11.87,101.1 v12.83,101.1 | 50.51,104.63 50.51,103.18 IC4.5 | 50.51,104.63 53.07,107.19 R_RESET.2 53.21,107.33 v53.97,107.33
  Top 0.3: 46.42,104.7 50.37,104.7 50.51,104.63 | 46.42,104.7 46.28,104.7 43.79,107.19 28.07,107.19 R_BOOT.2 27.93,107.12 v27.38,106.57 | v66.78,107.26 68.03,107.26 R_CHANGE.2 | 46.42,104.7 46.42,83.92 34.93,72.43 34.93,53.73 35.96,52.69 36.1,52.62
  Bottom 0.3: v125.16,55.39 125.16,50.06 v124.19,49.09 | v66.78,107.26 59.09,107.26 57.36,108.99 55.63,108.99 v53.97,107.33 | v12.83,101.1 21.91,101.1 v27.38,106.57 | v61.86,24.16 v78.21,24.16
32KHZ  (via drill 0.3)
  Top 0.15: 93.27,53.07 92.89,52.69 92.68,52.69 U3.1 | 93.27,53.07 94.69,54.49 96.07,54.49 R2-PINH1.1 | v18.79,43.76 18.03,44.52 18.03,44.87 U2.9 | v24.75,40.99 35.69,40.99 38.25,38.43 52.65,38.43 v53,38.77 | v93.3,53.04 93.27,53.07
  Bottom 0.15: v18.79,43.76 21.98,43.76 v24.75,40.99 | v53,38.77 79.04,38.77 v93.3,53.04
EPD_3V3  (via drill 0.3)
  Top 0.3: TP17.TP 115.81,9.96 115.81,15.71 111.93,19.59 111.93,19.73 EPD_C5.2 111.79,19.8 100.23,19.8 97.87,22.15 90.46,22.15 89.35,23.26 89.35,23.68 C7.1 89.29,23.82 88.18,23.82 | J1.15 88.66,14.74 88.25,14.74 J1.16 88.18,14.88 v88.18,15.85 | 88.18,23.82 85.89,23.82 Q2.2 | v88.18,23.68 88.18,23.82 | v93.48,28.37 93.48,28.41 93.52,28.43 94.5,29.25 L1.2
  Bottom 0.3: v88.18,15.85 v88.18,23.68 88.32,23.75 92.94,28.37 v93.48,28.37
EPD_3V3_C  (via drill 0.3)
  Top 0.3: v84.99,23.47 84.37,24.09 R_CL1.1 | v86.66,25.27 86.31,25.27 85.89,25.68 Q2.1 | v20.59,60.17 20.59,62.39 U2.18 | v24.05,34.13 24.05,21.67 30.49,15.23 TP13.TP
  Bottom 0.3: 84.99,23.61 v84.99,23.47 | v86.66,25.27 84.99,23.61 | v20.59,60.17 20.59,51.72 25.58,46.74 25.58,40.92 | 25.58,40.92 24.05,39.4 v24.05,34.13 | 84.99,23.61 84.85,23.68 79.87,23.68 75.5,28.04 50.02,28.04 39.08,38.98 39.08,39.4 37.63,40.85 25.71,40.85 25.58,40.92
EPD_BUSY  (via drill 0.3)
  Top 0.15: v91.71,17.79 91.71,14.74 J1.9 | v93.23,41.61 93.23,32.12 93.05,31.94 93.05,28.19 93.09,28.15 v93.09,24.37 | 89.35,51.45 89.35,53.8 89.22,53.94 89.22,90.02 TP9.TP | 89.35,51.45 v89.35,47.29 | v34.37,56.36 16.16,56.36 10.41,62.11 10.41,62.39 U2.26 | 89.35,51.45 v87,51.45
  Bottom 0.15: v91.71,17.79 91.71,22.98 v93.09,24.37 | v93.23,41.61 93.23,43.41 v89.35,47.29 | v34.37,56.36 52.45,56.36 57.36,51.45 v87,51.45
EPD_CS  (via drill 0.3)
  Top 0.15: v87.62,16.13 87.83,16.34 88.94,16.34 90.12,15.16 90.12,14.74 J1.12 | v56.46,27.42 55.77,28.11 R9.1 55.7,28.11 53.21,25.62 43.72,25.62 32.09,13.98 30.08,13.98 28.62,15.44 25.65,15.44 TP10.TP | v38.53,39.19 38.53,44.94 37.7,45.77 37.7,45.98 D6.2 | v24.61,39.19 20.59,43.21 20.59,44.87 U2.11
  Bottom 0.15: v87.62,16.13 86.86,16.13 75.57,27.42 v56.46,27.42 50.09,27.42 38.53,38.98 v38.53,39.19 v24.61,39.19
EPD_DC  (via drill 0.3)
  Top 0.15: v90.32,15.57 90.67,15.23 90.67,14.74 J1.11 | v56.05,15.09 34.99,15.09 TP11.TP 35.2,15.16 v35.2,16.47 | v15.53,41.41 12.97,43.97 12.97,44.87 U2.5
  Bottom 0.15: v90.32,15.57 89.35,15.57 88.87,15.09 74.12,15.09 66.71,22.5 63.46,22.5 v56.05,15.09 | v15.53,41.41 15.53,36.14 v35.2,16.47
EPD_RST  (via drill 0.3)
  Top 0.15: v45.52,84.2 38.25,84.2 16.78,62.73 16.78,62.46 U2.21 | v76.27,84.2 89.22,97.15 TP12.TP
  Bottom 0.15: v76.27,84.2 v45.52,84.2
FLASH_CS  (via drill 0.3)
  Top 0.15: 53.66,44.07 53.48,43.9 53.48,32.89 D9.2 | 53.66,44.07 53.83,44.24 54.11,44.24 72.87,25.48 82.64,25.48 R5.1 | v37.42,54.91 36.1,54.91 U1.1 | 53.66,44.07 52.51,45.21 v50.64,45.21 50.58,45.21 44.07,38.7 38.39,38.7 33.33,43.76 v25.02,43.76 | v22.6,43.76 21.84,44.52 21.84,44.87 U2.12
  Bottom 0.15: v37.42,54.91 40.95,54.91 v50.64,45.21 | v25.02,43.76 v22.6,43.76
GDR
  Top 0.15: J1.2 95.24,14.74 95.24,15.37 98.5,18.62 98.5,20.98 97.73,21.74 78.83,21.74 77.79,20.7 R4.2 77.72,20.7 77.17,21.25 75.09,21.25 71.9,18.07 71.7,18.07 Q3.1
GND  (via drill 0.3)
  Top 0.15: TP4.TP 89.15,93.69 89.15,95.35 90.46,96.67 90.46,104.98 89.15,106.29 TP5.TP 89.08,106.36 85.48,106.36 84.02,107.82 65.81,107.82 65.74,107.75 CHANGE_BUTTON.2 65.67,107.68 63.73,107.68 62.97,106.92 60.2,106.92 59.92,107.19 C10.2 59.85,107.19 57.15,107.19 56.6,106.64 54.45,106.64 | 54.45,106.64 54.45,107.47 54.11,107.82 50.92,107.82 50.78,107.68 RESET_BUTTON.2 50.71,107.68 47.32,107.68 RESET_BUTTON.1 47.18,107.61 46.84,107.26 44.97,107.26 C5.2 44.9,107.33 44.41,107.82 27.45,107.82 27.31,107.68 25.78,107.68 BOOT_BUTTON.2 25.71,107.61 v24.61,107.61 | 54.45,106.64 54.45,106.09 50.58,102.21 47.67,102.21 IC4.2 | 3.04,94.28 2.24,95.07 J4.G4 | 3.04,94.28 4.73,92.58 4.87,92.58 J4.P6 4.73,92.51 1.27,89.05 1.27,82.33 J4.G3 1.27,82.26 1.27,68.97 7.78,62.46 U2.28 7.85,62.39 7.85,58.03 12.35,53.52 U2.29_3 12.35,53.46 13.53,53.46 U2.29_6 13.6,53.46 14.77,53.46 U2.29_9 14.84,53.39 14.84,52.21 U2.29_8 14.84,52.14 14.84,50.96 U2.29_7 | J4.G1 15.53,85.31 15.53,86.35 16.3,87.11 16.3,90.16 15.53,90.92 J4.G2 15.47,90.99 15.47,92.03 14.22,93.27 14.22,98.54 D11.1 14.15,98.61 14.15,100.41 13.63,100.92 | 13.63,100.92 12.9,101.65 11.24,101.65 10.69,101.1 9.86,101.1 C9.2 9.79,101.03 3.04,94.28 | 13.63,100.92 19.9,107.19 C6.2 19.97,107.33 20.24,107.61 v20.8,107.61 | 12.97,52.14 13.53,52.14 U2.29_5 | 12.97,52.14 12.35,52.14 U2.29_2 | 12.97,50.89 13.53,50.89 U2.29_4 13.6,50.89 14.77,50.89 U2.29_7 | 12.97,50.89 12.35,50.89 U2.29_1 12.28,50.82 7.85,46.39 7.85,44.94 U2.1 | U2.29_7 14.91,51.17 36.03,51.17 U1.4 36.1,51.1 36.45,50.75 v36.45,50.55 | v36.86,45.35 37.63,44.59 D6.1
  Top 0.15: 12.97,50.89 12.97,52.14 | J1.17 87.69,14.67 87.69,14.33 89.42,12.6 91.09,12.6 92.12,13.64 92.12,14.67 J1.8 92.19,14.74 92.19,15.85 95.45,19.11 EPD_C7.1 95.52,19.18 96.21,19.18 | 87.28,20.91 87.28,20.56 86.1,19.38 86.1,19.18 EPD_C12.1 | 87.28,20.91 87.42,21.05 90.39,21.05 90.53,20.91 | 90.53,20.91 90.53,19.8 89.91,19.18 EPD_C10.1 89.84,19.18 87.97,19.18 EPD_C11.1 | EPD_C9.1 91.92,19.18 93.65,19.18 EPC_C8.1 93.65,19.25 94.83,20.42 94.83,20.91 | 96.21,19.18 97.46,19.18 EPC_C6.1 | 94.83,20.91 94.96,21.05 96,21.05 96.21,20.84 96.21,19.18 | 91.09,20.91 91.22,20.91 91.36,21.05 94.62,21.05 94.76,20.91 94.83,20.91 | 91.09,20.91 90.53,20.91 | 77.72,18.14 77.72,19.31 R4.1 77.79,19.38 78,19.38 78.48,19.87 80.56,19.87 D12.1 80.63,19.94 81.74,21.05 86.58,21.05 86.72,20.91 87.28,20.91 | 77.72,18.14 77.72,17.51 EPD_C2.2 | EPD_C1.2 75.92,12.87 76.68,12.87 77.31,12.25 83.12,12.25 J1.MP2 83.19,12.18 83.54,11.84 92.4,11.84 92.75,12.18 96.63,12.18 J1.MP1 96.7,12.25 102.86,18.41 111.86,18.41 EPD_C5.1 | EPD_C1.2 75.92,12.8 75.16,12.04 75.16,11.28 74.47,10.59 73.15,10.59 72.32,11.42 72.32,11.63 SJ1.1 72.32,11.7 72.73,12.11 72.73,13.91 R2.1 72.73,13.98 55.77,30.95 55.77,31.29 D10.1 55.7,31.36 53.55,31.36 D9.1 53.48,31.29 50.71,31.29 D8.1 50.64,31.29 v49.95,31.99 | 77.72,18.14 75.92,18.14 75.78,18 75.78,13.01 75.85,12.94 EPD_C1.2 | v93.3,53.73 93.3,54.84 R1_PWRUSB.1 | v98.08,48.95 98.08,45.21 C10_SUPERCAP.1 | 91.22,40.23 91.22,40.85 C8.2 | 91.22,40.23 91.22,33.65 89.56,31.99 89.56,26.52 90.6,25.48 90.6,23.88 C7.2 90.67,23.82 v91.29,23.19 | 91.22,40.23 89.49,40.23 88.87,40.85 88.87,43.34 U3.13 88.87,43.41 v88.87,44.8
  Top 0.15: IC1.3 115.46,45.28 115.32,45.28 114.77,45.84 112.55,45.84 111.45,46.95 110.61,46.95 C_DELAY.2 110.55,46.88 109.85,46.18 | 111.1,43.97 112.76,43.97 114.15,42.58 114.28,42.58 C1_BAT.2 114.35,42.58 121.28,42.58 123.36,44.66 C3.- 123.5,44.73 125.71,46.95 | 111.1,43.97 109.85,45.21 109.85,46.18 | D3.1 106.04,29.29 106.04,38.84 111.1,43.9 111.1,43.97 | SENSOR2.7 156.53,10.66 156.53,11.28 155.77,12.04 155.77,13.5 SENSOR2.1 155.77,13.57 155.77,13.77 156.25,14.26 158.47,14.26 160.09,12.63 | 158.19,8.1 159.02,8.1 159.09,8.16 C2.2 | 158.19,8.1 C1.2 | 158.19,8.1 158.19,10.59 SENSOR2.5 158.12,10.66 160.09,12.63 | 160.09,12.63 165.18,17.72 J3.1 165.25,17.79 165.6,17.79 166.15,18.34 166.15,49.23 | 166.98,59.41 J2.MP4 164.98,59.41 164.35,58.79 164.35,57.96 J2.A12 164.35,57.89 164.35,57.61 J2.B1 164.28,57.54 152.03,57.54 145.17,50.68 R2-USB.2 145.1,50.62 145.1,50.41 144.41,49.72 144.41,48.95 | 166.98,59.41 J2.MP2 | J2.B12 164.35,51.03 164.35,50.82 J2.A1 164.35,50.75 164.35,49.85 164.98,49.23 J2.MP3 165.05,49.23 166.15,49.23 | 166.15,49.23 166.98,49.23 | 166.98,49.23 168.92,49.23 J2.MP1 | 166.98,49.23 166.98,59.41 | C4_USB.2 151.26,45.84 151.26,47.08 C5_USB.2 151.19,47.15 151.19,47.43 148.63,49.99 D1.2 | 144.41,48.95 144.62,48.75 146,48.75 147.25,49.99 148.22,49.99 D1.2 | R2-USB1.1 152.72,51.79 150.36,51.79 148.56,49.99 148.36,49.99 D1.2 | U4.4 129.52,56.43 129.87,56.43 130.56,57.12 U4.9 | U4.9 130.56,57.19 129.87,57.89 129.52,57.89 U4.1 129.52,57.82 125.23,57.82 C1_BAT2.2 125.16,57.75 v124.47,57.05 | U4.6 130.84,56.92 130.63,57.12 U4.9 | 125.71,46.95 126.82,46.95 C1_BAT1.2 126.89,47.01 139.35,47.01 141.29,48.95 144.41,48.95
  Top 0.15: 125.71,46.95 125.71,48.19 124.26,49.65 119.41,49.65 R2_BAT.1 119.34,49.72 117.4,49.72 114.67,52.45 | 114.67,52.45 112.28,54.84 112.28,55.05 C2_BAT.2 | 114.67,52.45 115.18,52.97 115.18,54.01 115.46,54.29 121.63,54.29 MCP73831.2 121.69,54.36 122.11,54.77 v122.59,54.77 | v109.71,46.25 109.78,46.18 109.85,46.18 | v91.09,20.98 91.09,20.91
  Bottom 0.15: v36.45,50.55 36.86,50.13 v36.86,45.35 36.86,45.08 v49.95,31.99 | v20.8,107.61 v24.61,107.61 | 94.24,52.8 v98.08,48.95 107.01,48.95 v109.71,46.25 | 94.24,52.8 v93.3,53.73 | 94.24,52.8 88.87,47.43 v88.87,44.8 | v124.47,57.05 124.47,56.64 v122.59,54.77 | v91.09,20.98 91.09,22.98 v91.29,23.19
  pour Top: 80.71,10.06 80.73,10.08 98.97,10.08 98.99,10.06 99.01,10.04 99.03,10.02 99.03,0.03 99.08,-0.02 170.08,-0.02 170.07,-0.02 170.07,67.02 92.23,67.02 92.21,67.04 92.09,67.16 92.07,67.18 92.07,111.22 69.23,111.22 69.23,109.98 69.21,109.96 69.19,109.94 69.17,109.92 20.03,109.92 20.01,109.94 19.99,109.96 19.97,109.98 19.97,111.02 0.13,111.02 0.13,62.73 0.18,62.68 6.37,62.68 6.39,62.66 6.51,62.54 6.53,62.52 6.53,44.58 6.51,44.56 6.49,44.54 6.47,44.52 0.13,44.52 0.13,0.08 80.67,0.08 80.67,10.02 80.69,10.04
  pour Bottom: 80.71,10.06 80.73,10.08 98.97,10.08 98.99,10.06 99.01,10.04 99.03,10.02 99.03,0.23 99.18,0.08 170.07,0.08 170.07,67.12 92.23,67.12 92.21,67.14 92.09,67.26 92.07,67.28 92.07,111.22 69.23,111.22 69.23,109.98 69.21,109.96 69.19,109.94 69.17,109.92 69.13,109.92 69.11,109.94 69.02,110.02 20.03,110.02 20.01,110.04 19.99,110.06 19.97,110.08 19.97,111.02 0.13,111.02 0.13,62.73 0.18,62.68 6.37,62.68 6.39,62.66 6.41,62.64 6.43,62.62 6.43,44.68 6.41,44.66 6.29,44.54 6.27,44.52 0.13,44.52 0.13,0.08 80.57,0.08 80.57,9.92 80.59,9.94
I2C_PW  (via drill 0.3)
  Top 0.15: C2.1 159.09,6.85 157.7,6.85 C1.1 157.64,6.85 157.5,6.85 156.25,8.1 R2-PINH.2 | R1_PINH.2 154.73,8.1 156.11,8.1 R2-PINH.2 | 155.77,9.9 155.77,8.16 R2-PINH.2 | 155.77,9.9 155.77,10.59 SENSOR2.8 | 155.77,9.9 156.87,9.9 157.36,10.38 157.36,10.59 SENSOR2.6 157.29,10.66 157.29,10.93 156.6,11.63 156.6,12.67 | 156.6,12.67 156.6,13.5 SENSOR2.2 | v34.37,60.1 23.84,60.1 21.84,62.11 21.84,62.39 U2.17 | v88.18,44.59 v72.67,60.1 | v156.53,12.67 156.6,12.67
  Bottom 0.15: v72.67,60.1 v34.37,60.1 | v88.18,44.59 94.06,38.7 130.49,38.7 v156.53,12.67
INT_RTC  (via drill 0.3)
  Top 0.15: 90.57,47.88 90.12,48.33 90.12,52.62 U3.3 | 90.57,47.88 95.1,43.34 95.31,43.34 R1_PINH1.1 | v18.58,42.79 16.78,44.59 16.78,44.87 U2.8 | v24.12,40.99 26.96,38.15 v53,38.15 | v88.39,46.32 89.01,46.32 90.57,47.88 | v121,13.98 121,9.83 TP15.TP
  Bottom 0.15: v18.58,42.79 22.32,42.79 v24.12,40.99 | v53,38.15 80.21,38.15 87.1,45.04 | v88.39,46.32 87.1,45.04 | v121,13.98 121,16.27 98.84,38.43 93.72,38.43 87.1,45.04
IO/BOOT
  Top 0.15: R_BOOT.1 28,108.58 26.27,108.58 25.78,109.06 BOOT_BUTTON.3 25.71,109.06 25.37,109.06 23.95,107.64 | C6.1 19.97,108.58 21.7,108.58 22.18,109.06 BOOT_BUTTON.4 22.32,109.13 22.46,109.13 23.95,107.64 | 23.95,107.64 46.01,85.59 46.01,84.06 24.4,62.46 U2.15
IO/CHANGE  (via drill 0.3)
  Top 0.15: R_CHANGE.1 68.03,108.58 66.29,108.58 65.74,109.13 CHANGE_BUTTON.3 65.67,109.2 62.28,109.2 CHANGE_BUTTON.4 62.21,109.13 61.66,108.58 59.92,108.58 C10.1 59.85,108.51 59.79,108.44 v57.15,108.44 | v39.84,91.13 14.22,65.5 14.22,62.46 U2.23
  Bottom 0.15: v57.15,108.44 v39.84,91.13
MISO  (via drill 0.3)
  Top 0.15: 55.18,28.7 55.21,28.73 56.67,28.73 v62.63,22.78 | 55.18,28.7 54.66,28.18 53.69,28.18 R8.1 | v81.32,19.18 D12.2 | v25.58,54.29 16.99,54.29 9.16,62.11 9.16,62.39 U2.27 9.09,62.46 9.09,62.67 v6.6,65.16 | v6.6,92.23 5.22,93.62 5.08,93.62 J4.P7 | TP6.TP 83.68,106.36 83.68,103.52 35.34,55.19 35.34,54.49 35.48,54.36 v35.48,54.29 36.03,53.73 U1.2 36.1,53.73 36.52,54.15 v36.86,54.15 | v54.94,28.94 55.18,28.7
  Bottom 0.15: v62.63,22.78 77.72,22.78 v81.32,19.18 | v25.58,54.29 v35.48,54.29 | v6.6,65.16 v6.6,92.23 | v54.94,28.94 54.94,35.59 44.48,46.05 44.48,48.95 39.29,54.15 v36.86,54.15
MOSI  (via drill 0.3)
  Top 0.15: v88.73,15.57 89.15,15.16 89.15,14.74 J1.14 | v51.96,26.93 50.78,28.11 R7.1 50.71,28.11 v50.02,28.8 | v43.93,39.19 43.93,51.1 U1.5 | v15.74,95.07 15.74,98.54 D11.2 | v49.33,31.99 29.91,31.99 20.49,41.41 18.72,41.41 15.47,44.66 15.47,44.87 U2.7 | v46.97,100.61 56.74,100.61 62.42,106.29 78.21,106.29 TP7.TP
  Bottom 0.15: v88.73,15.57 88.52,15.57 88.32,15.37 87.21,15.37 78.9,23.68 55.21,23.68 v51.96,26.93 | 50.44,31.5 50.44,29.22 v50.02,28.8 | 50.44,31.5 50.44,32.12 43.93,38.64 v43.93,39.19 43.93,46.46 35.62,54.77 31.81,54.77 15.74,70.84 v15.74,95.07 15.81,95.07 21.35,100.61 v46.97,100.61 | v49.33,31.99 49.81,31.5 50.44,31.5
N$1
  Top 0.15: R2-USB1.2 152.79,53.11 164.28,53.11 J2.A5
N$5
  Top 0.15: R2-USB.1 145.17,49.37 145.45,49.37 152.1,56.02 164.28,56.02 J2.B5
N$12  (via drill 0.3)
  Top 0.15: IC4.1 47.6,103.11 47.46,103.11 46.97,102.62 46.97,101.79 47.46,101.31 47.6,101.31 IC4.3 47.67,101.31 49.4,101.31 49.88,101.79 v57.29,101.79 | v114.15,44.73 113.73,45.14 112.97,45.14 D2.1 | v125.16,44.73 125.92,44.73 126.82,45.63 C1_BAT1.1 | v128.55,49.72 128.55,51.52 Q1.2
  Bottom 0.15: v114.15,44.73 v125.16,44.73 125.16,44.8 128.55,48.19 v128.55,49.72 128.55,53.59 124.6,57.54 100.71,57.54 89.22,69.04 89.22,71.88 59.3,101.79 v57.29,101.79
N$14
  Top 0.15: 103.34,28.46 107.43,28.46 108.05,29.08 108.05,29.43 C4.1 | 103.34,28.46 102.58,29.22 D3.2 | D4.1 102.58,25.68 102.58,27.62 103.34,28.39 103.34,28.46
N$16
  Top 0.15: GHC_LED.C 114.56,55.19 114.56,53.66 R1_BAT.1
N$17
  Top 0.15: R1_BAT.2 115.95,53.66 118.09,53.66 118.3,53.87 120.93,53.87 121.42,53.39 121.63,53.39 MCP73831.1
N$18
  Top 0.15: J1.24 84.23,14.74 84.23,18.62 86.03,20.42 EPD_C12.2
N$19
  Top 0.15: R2_BAT.2 119.34,51.03 119.34,53.04 119.06,53.32 MCP73831.5
N$20
  Top 0.15: J1.23 84.71,14.74 84.71,16.68 87,18.97 87,19.73 87.69,20.42 87.9,20.42 EPD_C11.2
N$21
  Top 0.15: J1.22 85.2,14.74 85.2,16.75 87.28,18.83 87.28,19.59 87.55,19.87 89.29,19.87 89.84,20.42 EPD_C10.2
N$22  (via drill 0.3)
  Top 0.15: v86.1,13.91 85.68,14.33 85.68,14.67 J1.21 | v91.02,20.01 91.22,20.01 91.64,20.42 91.85,20.42 EPD_C9.2
  Bottom 0.15: v86.1,13.91 86.58,13.91 87.48,14.81 90.26,14.81 91.02,15.57 v91.02,20.01
N$23
  Top 0.15: J1.20 86.24,14.74 86.24,15.78 89.01,18.55 90.39,18.55 91.22,19.38 91.22,19.59 91.5,19.87 93.09,19.87 93.65,20.42 EPC_C8.2
N$24
  Top 0.15: J1.19 86.72,14.74 86.72,15.85 89.15,18.28 93.93,18.28 94.83,19.18 94.83,19.8 95.45,20.42 EPD_C7.2
N$25  (via drill 0.3)
  Top 0.15: v87.21,13.91 87.21,14.67 J1.18 | v96.83,19.8 97.46,20.42 EPC_C6.2
  Bottom 0.15: v87.21,13.91 90.95,13.91 v96.83,19.8
N$26
  Top 0.15: J1.5 93.65,14.67 93.65,14.33 91.64,12.32 84.02,12.32 79.52,16.82 77.03,16.82 76.41,17.44 EPD_C2.1
N$27  (via drill 0.3)
  Top 0.15: v92.26,12.32 94.13,14.19 94.13,14.67 J1.4 | v76.61,12.32 75.92,11.63 EPD_C1.1
  Bottom 0.15: v76.61,12.32 v92.26,12.32
N$28
  Top 0.15: R1.1 19.27,42.17 19.27,44.87 U2.10
N$31  (via drill 0.3)
  Top 0.15: v96.9,53.39 97.73,53.39 R_CAPACITOR.1 | v91.99,56.23 91.64,56.23 91.22,56.64 D7.1
  Bottom 0.15: v96.9,53.39 94.83,53.39 v91.99,56.23
N$32
  Top 0.15: C_DELAY.1 110.61,45.63 111.31,45.63 112.69,44.24 115.6,44.24 118.3,46.95 118.3,47.08 IC1.5
RESE
  Top 0.15: J1.3 94.69,14.74 94.69,15.23 98.22,18.76 98.22,20.84 97.6,21.46 79.66,21.46 78.27,20.08 76.89,20.08 76.34,20.63 R3.2 76.27,20.63 73.7,18.07 73.01,18.07 Q3.2
RESE'
  Top 0.15: SJ1.2 73.84,11.7 74.05,11.9 74.05,13.91 R2.2 74.12,13.98 74.12,16.75 76.27,18.9 76.27,19.31 R3.1
RESET  (via drill 0.3)
  Top 0.15: v10.41,43.76 10.41,44.87 U2.3 | v44.07,108.3 44.69,108.3 44.9,108.51 C5.1 44.97,108.58 46.63,108.58 47.18,109.13 RESET_BUTTON.4 47.25,109.2 50.71,109.2 RESET_BUTTON.3 50.78,109.13 51.34,108.58 53.07,108.58 R_RESET.1 53.14,108.51 54.04,108.51 55.42,107.12 v56.46,107.12 | v89.7,69.17 92.06,66.82 95.59,66.82 115.25,47.15 115.46,47.15 IC1.1
  Bottom 0.15: v10.41,43.76 10.41,99.3 19.41,108.3 v44.07,108.3 | v89.7,69.17 89.7,73.88 v56.46,107.12
RTC_RST  (via drill 0.3)
  Top 0.15: v23.71,63.5 23.08,62.87 23.08,62.46 U2.16 | v69.96,63.5 78.34,63.5 88.8,53.04 88.8,52.69 U3.4
  Bottom 0.15: v69.96,63.5 v23.71,63.5
RX
  Top 0.15: U2.24 12.9,62.46 12.9,69.8 12.76,69.94 TP2.TP
SCK  (via drill 0.3)
  Top 0.15: v90.95,13.08 89.7,14.33 89.7,14.67 J1.13 | v108.26,13.08 111.38,9.96 TP8.TP | 36.93,46.53 36.93,46.6 41.02,50.68 42.2,50.68 | 36.93,46.53 36.93,46.05 35.76,44.87 35.76,44.66 R6.1 | 42.2,50.68 43.86,52.35 U1.6 | v53.97,34.62 55.7,32.89 D10.2 55.77,32.82 v66.57,22.02 | v42.2,50.62 42.2,50.68 | v15.05,43.76 14.22,44.59 14.22,44.87 U2.6 | 36.93,46.53 v25.02,46.53 | v10.9,63.56 3.9,70.56 3.9,90.78 4.52,91.4 5.01,91.4 J4.P5
  Bottom 0.15: v108.26,13.08 v90.95,13.08 75.5,13.08 v66.57,22.02 | v53.97,34.62 53.97,36.14 44.2,45.91 44.2,48.61 v42.2,50.62 | v25.02,46.53 20.94,46.53 18.17,43.76 v15.05,43.76 15.05,43.83 10.9,47.98 v10.9,63.56
SCL  (via drill 0.3)
  Top 0.15: v156.94,6.23 156.39,6.78 R2-PINH.1 | v157.15,12.04 158.12,13.01 158.12,13.5 SENSOR2.4 | v164.21,20.21 164.7,20.7 165.18,20.7 J3.4 | v132.22,56.57 132.08,56.71 132.08,57.12 131.81,57.4 131.53,57.4 U4.7 | U3.16 92.68,43.41 v93.3,44.04 93.37,44.04 94.69,42.72 95.86,42.72 96,42.86 96,43.83 95.93,43.9 94.96,43.9 90.81,48.05 90.81,53.52 90.26,54.08 v89.7,54.08 | v34.37,56.99 23.15,56.99 18.03,62.11 18.03,62.39 U2.20
  Bottom 0.15: v156.94,6.23 156.94,11.84 v157.15,12.04 157.22,12.04 164.21,19.04 v164.21,20.21 164.21,26.1 132.71,57.61 132.43,57.61 132.08,57.26 132.08,56.78 132.22,56.64 v132.22,56.57 132.22,51.93 128.83,48.54 128.83,47.78 125.09,44.04 v93.3,44.04 | v34.37,56.99 52.24,56.99 55.15,54.08 v89.7,54.08
SDA  (via drill 0.3)
  Top 0.15: v155.42,7.47 155.35,7.47 154.73,6.85 R1_PINH.1 | v157.15,12.67 157.15,13.29 157.36,13.5 SENSOR2.3 | v159.78,15.23 164.28,19.73 165.18,19.73 J3.3 | v123.98,55.39 123.98,57.68 124.67,58.37 130.7,58.37 131.11,57.96 131.46,57.96 U4.8 131.53,57.89 131.81,57.89 v132.57,57.12 | v92.47,44.8 91.43,43.76 91.43,43.41 U3.15 91.36,43.76 89.84,45.28 88.8,45.28 v79.52,54.56 | v25.3,63.98 20.59,63.98 19.27,62.67 19.27,62.46 U2.19
  Bottom 0.15: v155.42,7.47 155.42,10.93 v157.15,12.67 157.22,12.67 v159.78,15.23 159.78,29.91 v132.57,57.12 | v123.98,55.39 123.98,54.56 114.63,45.21 92.89,45.21 v92.47,44.8 | v25.3,63.98 70.1,63.98 v79.52,54.56
SRC  (via drill 0.3)
  Top 0.15: v107.01,29.22 107.01,29.49 108.05,30.53 108.05,30.74 C4.2 | v91.42,29.22 90.32,29.22 L1.1 | 87.52,31.19 88.94,32.61 D5.2 | 87.52,31.19 83.68,27.35 83.68,25.41 83.12,24.85 78.27,24.85 73.57,20.14 72.32,20.14 Q3.3 | 87.52,31.19 v89.01,29.7
  Bottom 0.15: v107.01,29.22 v91.42,29.22 89.49,29.22 v89.01,29.7
SS_SD  (via drill 0.3)
  Top 0.15: R10.1 11.73,99.71 11.73,94.45 5.49,88.22 J4.P2 5.49,88.15 v9.93,83.72 | v29.87,32.75 50.64,32.75 D8.2 | v12.56,43.76 11.66,44.66 11.66,44.87 U2.4
  Bottom 0.15: v29.87,32.75 24.81,32.75 13.8,43.76 v12.56,43.76 12.49,43.76 12,43.28 10.27,43.28 9.93,43.62 v9.93,83.72
TX
  Top 0.15: U2.25 11.66,62.46 11.66,68 9.58,70.07 TP1.TP
USB_D-  (via drill 0.3)
  Top 0.15: v106.53,30.12 106.53,30.32 107.57,31.36 129.03,31.36 146.69,49.02 148.22,49.02 D1.3 | v45.52,37.67 26.82,37.67 23.08,41.41 23.08,44.87 U2.13
  Bottom 0.15: v106.53,30.12 89.22,30.12 89.15,30.19 56.81,30.19 55.08,28.46 54.73,28.46 v45.52,37.67
VBAT
  Top 0.15: C2_BAT.1 110.96,55.12 111.17,55.12 111.93,55.88 121.07,55.88 121.63,55.32 MCP73831.3 121.69,55.26 123.5,55.26 123.84,54.91 127.65,54.91 | U4.2 129.52,57.4 129.52,56.92 U4.3 129.45,56.85 129.1,56.85 128.66,56.4 | 127.65,54.91 127.65,55.39 128.66,56.4 | 127.65,54.91 Q1.3 | 128.66,56.4 129.03,56.02 132.29,56.02 140.95,64.67 154.59,64.67 TP3.TP
VBUS  (via drill 0.3)
  Top 0.3: 116.78,55.26 118.99,55.26 MCP73831.4 | 116.78,55.26 116.09,55.26 GHC_LED.A | 110.65,48.92 102.1,57.47 92.82,57.47 92.54,57.19 92.54,55.95 91.99,55.39 91.99,54.91 R1_PWRUSB.2 | 110.65,48.92 112.28,47.29 112.9,47.29 D2.2 | v116.78,55.05 116.78,55.26 | v110.75,49.02 110.65,48.92 | C5_USB.1 149.95,47.08 149.95,45.84 C4_USB.1 149.81,45.77 146.97,42.93 PFMF.050.1.2 146.83,43 v141.29,43 | v113.66,41.89 113.04,42.51 C1_BAT.1 | 129.17,48.33 v129.17,47.5 | 129.17,48.33 126.75,50.75 126.75,51.52 Q1.1 126.54,51.59 v120.31,51.59 | TP14.TP 157.91,64.6 156.39,64.6 140.19,48.4 129.31,48.4 129.17,48.33
  Bottom 0.3: v110.75,49.02 v116.78,55.05 116.92,54.98 v120.31,51.59 | v113.66,41.89 123.56,41.89 v129.17,47.5 129.31,47.43 133.74,43 v141.29,43
VRTC
  Top 0.15: 89.98,42.1 89.98,43.28 90.05,43.34 U3.14 | 89.98,42.1 89.98,40.92 C8.1 | R_CAPACITOR.2 97.8,54.56 97.8,54.42 101.34,50.89 101.34,43.34 100.99,43 98.15,43 C10_SUPERCAP.2 98.08,43 97.18,42.1 89.98,42.1
VUSB
  Top 0.3: J2.A4 164.28,51.52 160.06,51.52 151.47,42.93 PFMF.050.1.1